# Altium PCB EEG_tDCS_PCB.PcbDoc (part 1 of 2)
Units mm, origin at the board's own origin, x right, y up, seen from the top; angles counter-clockwise.
Board outline 75 x 58.5 mm, 2 copper layers (Top Layer, Bottom Layer); 118 components, 65 nets, 367 pads, 142 vias.
Unrouted connection lines stored in the file: 2.
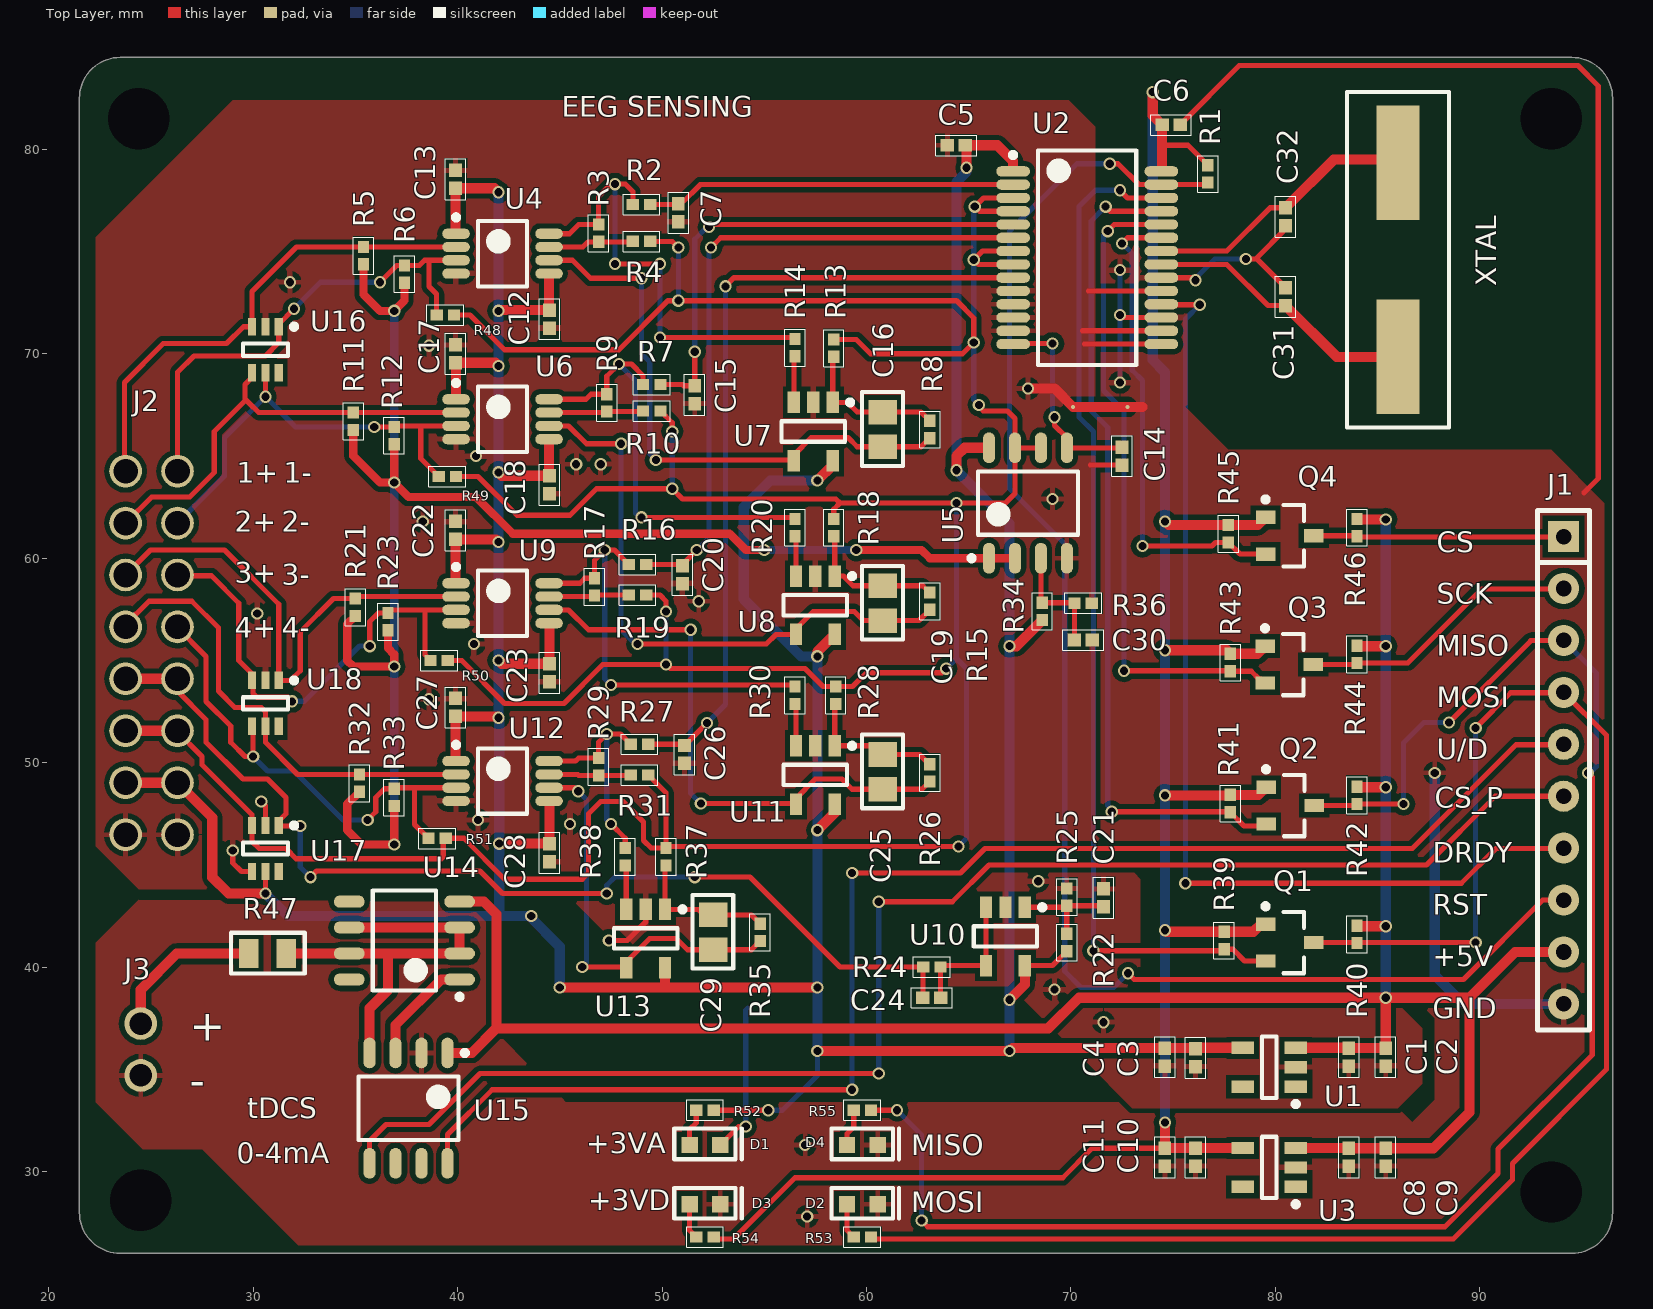
[diagram p0: Top Layer view]
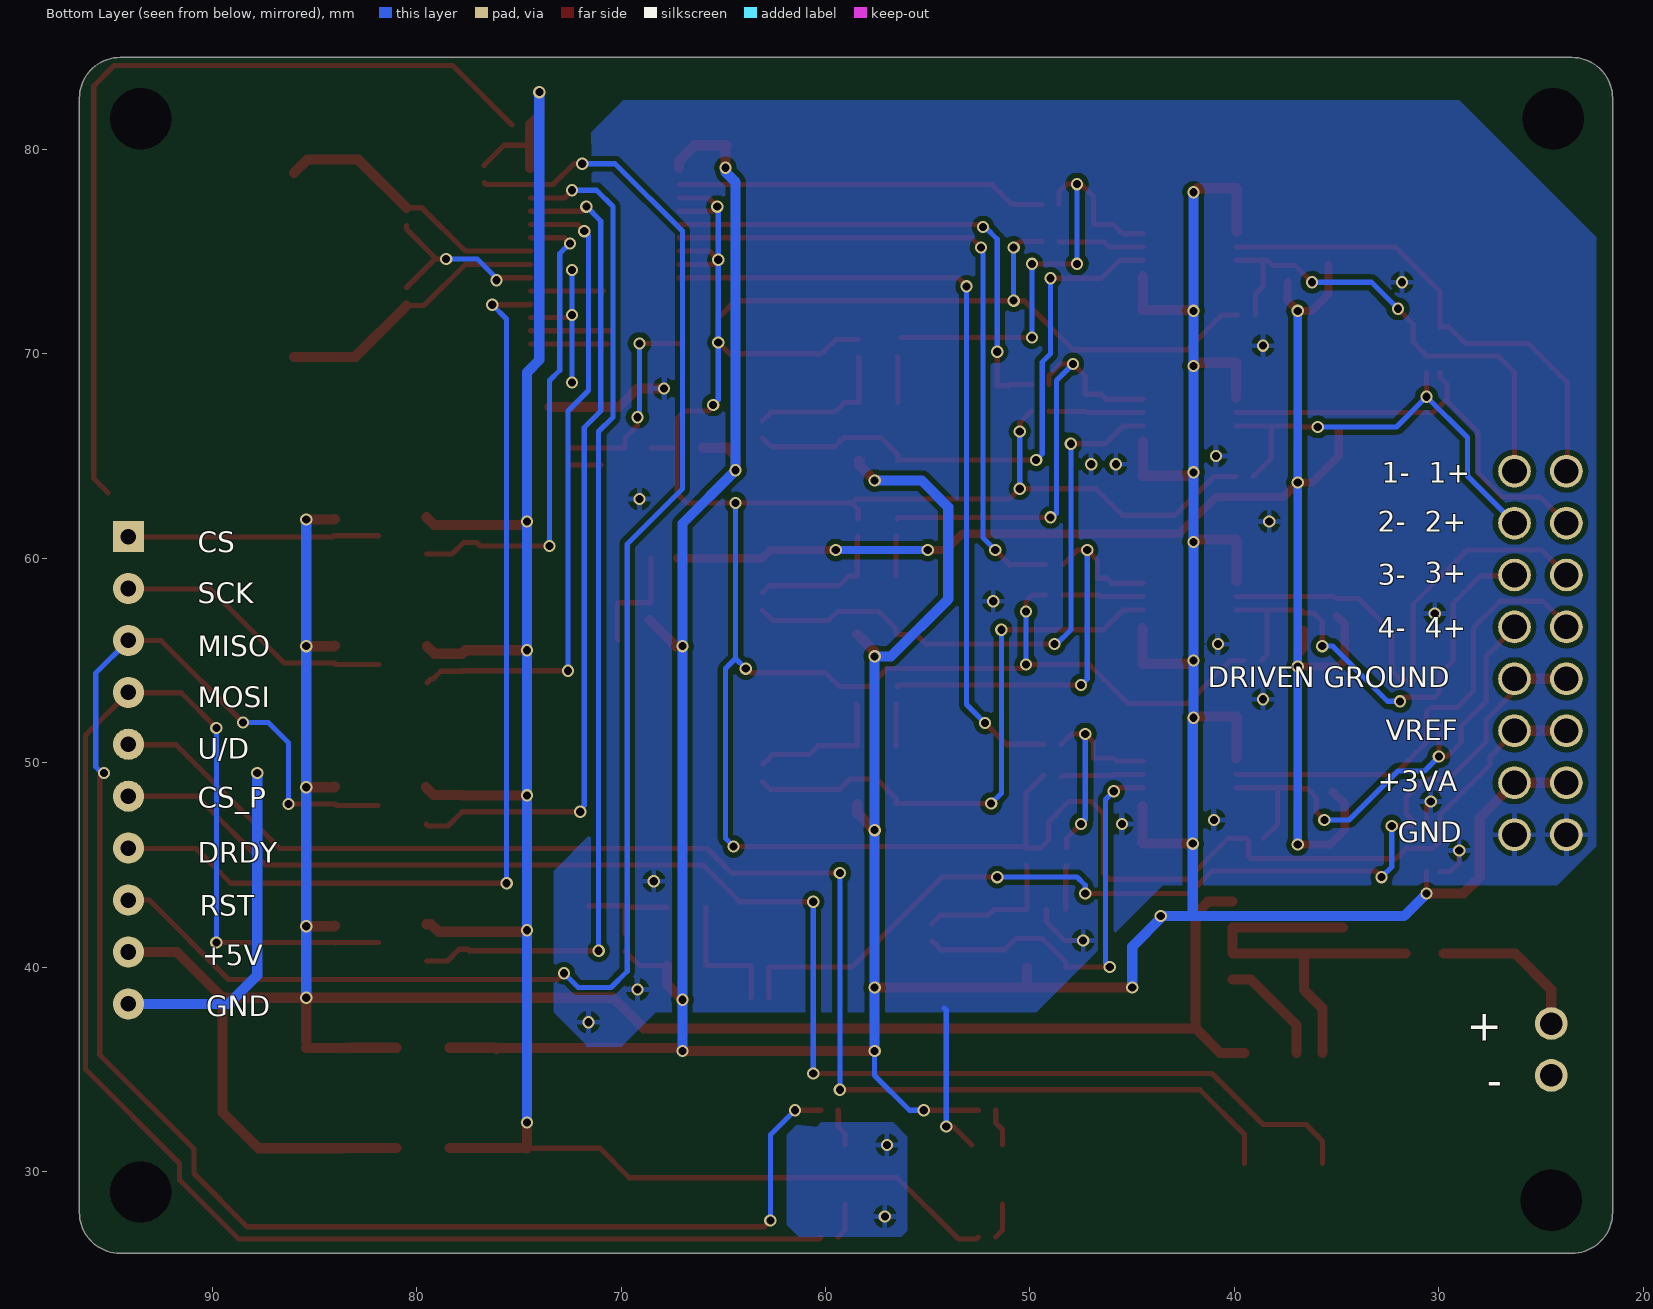
[diagram p1: Bottom Layer view, seen from below]
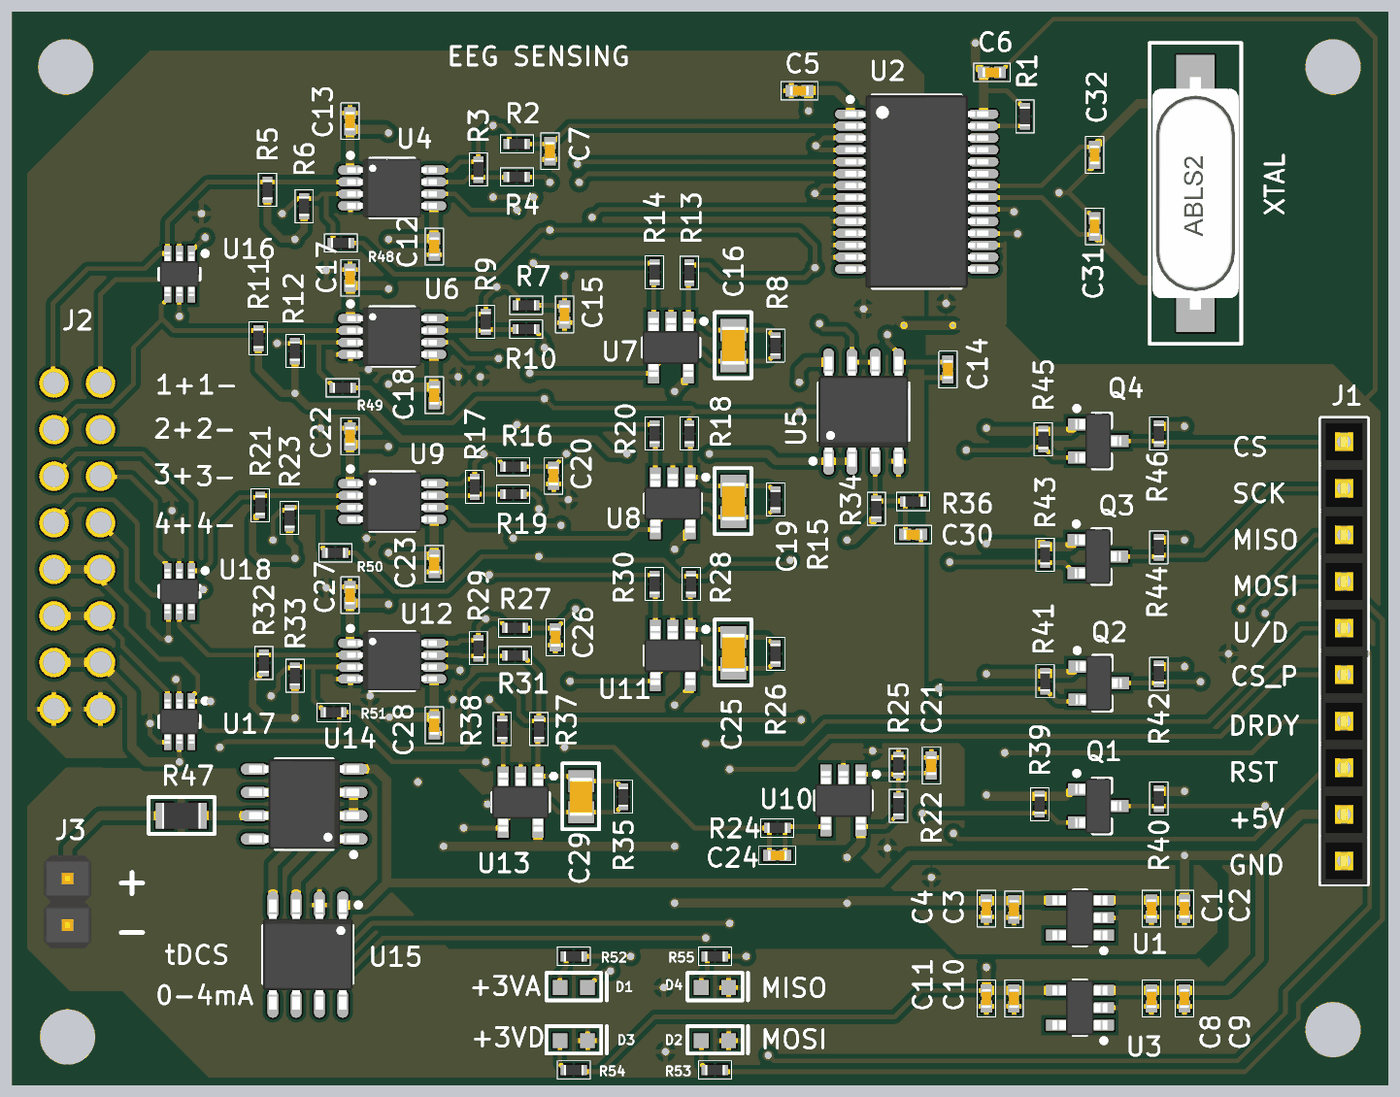
[diagram p2: 3D render of the assembled board from above, using the file's embedded part models]

## Layer stack, top to bottom
Top Solder: solder mask 0.0102, Solder Resist, Dk 3.5
Top Layer: signal copper 0.0356
Dielectric 1: dielectric 0.32, FR-4, Dk 4.8
Bottom Layer: signal copper 0.0356
Bottom Solder: solder mask 0.0102, Solder Resist, Dk 3.5

## Board outline
96.5,28 cw(c94.5,28) 94.5,26 23.5,26 cw(c23.5,28) 21.5,28 21.5,82.5 cw(c23.5,82.5) 23.5,84.5 94.5,84.5 cw(c94.5,82.5) 96.5,82.5

## Design rules (kind name [scope] priority, off if disabled: settings)
Clearance [All] p1: gap=0.254 ignorepadtopadclearanceinfootprint=TRUE except(0: Arc-Hole Track-Hole SMDPad-Hole THPad-Hole Via-Hole Fill-Hole Poly-Hole Region-Hole Text-Hole; 0.2: Arc-Arc Arc-Track Arc-SMDPad Track-Track Track-SMDPad)
PolygonConnect [All] p1: connectstyle=Relief reliefconductorwidth=0.254 reliefentries=4 polygonreliefangle="90 Angle" airgapwidth=0.254
RoutingVias [All] p1: holewidth=0.711 width=1.27 viastyle="Through Hole" minholewidth=0.711 minwidth=1.27 maxholewidth=0.711 maxwidth=1.27
SolderMaskExpansion [All] p1: expansion=0.102
Width [All] p1: maxlimit=2 minlimit=0.254 preferedwidth=0.254 minimp=50.000000 maximp=50.000000 favimp=50.000000
30 further rules are at their usual default settings.

## Components (designator, comment, footprint, x,y, rotation, side; value= is the part's Value field where it differs from the comment)
C1 "100nF" C0402 83.6,35.6 r90 top
C2 "1uF" C0402 85.4,35.6 r90 top
C3 "100nF" C0402 76.1,35.56 r90 top
C4 "1uF" C0402 74.6,35.6 r90 top
C5 "100nF" C0402 64.4,80.2 r0 top
C6 "100nF" C0402 74.9,81.2 r180 top
C7 "1uF" C0402 50.8,76.9 r90 top
C8 "100nF" C0402 83.6,30.7 r90 top
C9 "1uF" C0402 85.4,30.7 r90 top
C10 "100nF" C0402 76.1,30.7 r90 top
C11 "1uF" C0402 74.6,30.7 r90 top
C12 "100nF" C0402 44.5,71.7 r90 top
C13 "100nF" C0402 39.9,78.54 r270 top
C14 "100nF" C0402 72.5,65 r90 top
C15 "1uF" C0402 51.6,68 r90 top
C16 "22uF" C0805 60.8,66.3 r90 top
C17 "100nF" C0402 39.9,70 r270 top
C18 "100nF" C0402 44.5,63.6 r90 top
C19 "22uF" C0805 60.8,57.8 r90 top
C20 "1uF" C0402 51,59.2 r90 top
C21 "1uF" C0402 71.6,43.4 r270 top
C22 "100nF" C0402 39.9,61.36 r270 top
C23 "100nF" C0402 44.5,54.4 r90 top
C24 "1uF" C0402 63.2,38.5 r180 top
C25 "22uF" C0805 60.8,49.55 r90 top
C26 "1uF" C0402 51.1,50.4 r90 top
C27 "100nF" C0402 39.9,52.7 r270 top
C28 "100nF" C0402 44.5,45.6 r90 top
C29 "22uF" C0805 52.5,41.7 r90 top
C30 "1uF" C0402 70.6,56 r180 top
C31 "18pF" C0402 80.5,72.8 r270 top
C32 "18pF" C0402 80.5,76.7 r90 top
D1 "LTST-C191KGKT" LED_0603 52.1,31.3 r0 top
D2 "LTST-C191TBKT-5A" LED_0603 59.8,28.4 r0 top
D3 "LTST-C191KGKT" LED_0603 52.1,28.4 r0 top
D4 "LTST-C191TBKT-5A" LED_0603 59.8,31.3 r0 top
J1 "SAM1198-10-ND" "Header 10x1 8.5mm" 94.1,61.06 r270 top
J2 "302-R161" CONN16POS 26.3,64.26 r270 top
J3 "952-2262-ND" 2PIN_HEADER 24.5,37.24 r270 top
Q1 "BSS138-7-F" SOT23-3 80.7,41.2 r0 top
Q2 "BSS138-7-F" SOT23-3 80.725,47.9 r0 top
Q3 "BSS138-7-F" SOT23-3 80.675,54.8 r0 top
Q4 "BSS138-7-F" SOT23-3 80.7,61.1 r0 top
R1 "100k" R0402 76.7,78.8 r90 top
R2 "1k" R0402 49,77.3 r0 top
R3 "100k" R0402 46.9,75.9 r90 top
R4 "2k" R0402 49,75.5 r180 top
R5 "330k" R0402 35.4,74.8 r90 top
R6 "330k" R0402 37.4,73.9 r90 top
R7 "1k" R0402 49.5,68.5 r0 top
R8 "1M" R0402 63.1,66.3 r90 top
R9 "100k" R0402 47.3,67.6 r90 top
R10 "2k" R0402 49.5,67.2 r180 top
R11 "330k" R0402 34.9,66.7 r90 top
R12 "330k" R0402 36.9,66 r90 top
R13 "499k" R0402 58.4,70.275 r90 top
R14 "1M" R0402 56.5,70.3 r90 top
R15 "1M" R0402 63.1,57.9 r90 top
R16 "1k" R0402 48.8,59.7 r0 top
R17 "100k" R0402 46.7,58.6 r90 top
R18 "499k" R0402 58.4,61.5 r90 top
R19 "2k" R0402 48.8,58.2 r180 top
R20 "1M" R0402 56.5,61.5 r90 top
R21 "330k" R0402 35,57.6 r90 top
R22 "100k" R0402 69.8,41.2 r270 top
R23 "330k" R0402 36.6,56.9 r90 top
R24 "330k" R0402 63.2,40 r0 top
R25 "100k" R0402 69.8,43.425 r270 top
R26 "1M" R0402 63.1,49.5 r90 top
R27 "1k" R0402 48.9,50.9 r0 top
R28 "499k" R0402 58.5,53.3 r90 top
R29 "100k" R0402 46.9,49.8 r90 top
R30 "1M" R0402 56.5,53.3 r90 top
R31 "2k" R0402 48.9,49.4 r180 top
R32 "330k" R0402 35.2,49 r90 top
R33 "330k" R0402 36.9,48.3 r90 top
R34 "100k" R0402 68.6,57.4 r270 top
R35 "1M" R0402 54.8,41.7 r90 top
R36 "100k" R0402 70.6,57.8 r180 top
R37 "499k" R0402 50.2,45.4 r90 top
R38 "1M" R0402 48.2,45.4 r90 top
R39 "10k" R0402 77.5,41.3 r90 top
R40 "10k" R0402 84,41.6 r90 top
R41 "10k" R0402 77.8,48 r90 top
R42 "10k" R0402 84,48.4 r90 top
R43 "10k" R0402 77.8,54.9 r90 top
R44 "10k" R0402 84,55.3 r90 top
R45 "10k" R0402 77.7,61.2 r90 top
R46 "10k" R0402 84,61.5 r90 top
R47 "100R" R0805 30.7,40.665 r0 top
R48 "0R" R0402 39.4,71.9 r0 top
R49 "0R" R0402 39.5,64 r0 top
R50 "0R" R0402 39.1,55 r0 top
R51 "0R" R0402 39,46.3 r0 top
R52 "300R" R0402 52.1,33 r180 top
R53 "300R" R0402 59.8,26.8 r180 top
R54 "300R" R0402 52.1,26.8 r180 top
R55 "300R" R0402 59.8,33 r180 top
U1 "NCP551SN30T1G" TSOP-5 79.7,35.1 r180 top
U2 "MCP3912A1-E/SS" SSOP-28 70.8,74.7 r0 top
U3 "NCP551SN30T1G" TSOP-5 79.7,30.2 r180 top
U4 "AD8237ARMZ-R7" MSOP-8 42.2,74.9 r0 top
U5 "LM7332MAX/NOPB" 8-SOIC 67.9,62.7 r90 top
U6 "AD8237ARMZ-R7" MSOP-8 42.2,66.8 r0 top
U7 "MCP6V31T-E/OT" SOT23-5 57.4,66.2 r270 top
U8 "MCP6V31T-E/OT" SOT23-5 57.5,57.7 r270 top
U9 "AD8237ARMZ-R7" MSOP-8 42.2,57.8 r0 top
U10 "MCP6V31T-E/OT" SOT23-5 66.8,41.5 r270 top
U11 "MCP6V31T-E/OT" SOT23-5 57.5,49.4 r270 top
U12 "AD8237ARMZ-R7" MSOP-8 42.2,49.1 r0 top
U13 "MCP6V31T-E/OT" SOT23-5 49.2,41.4 r270 top
U14 "LM334MX/NOPB" 8-SOIC 37.4,41.3 r180 top
U15 "MCP4011-103E/SN" 8-SOIC 37.6,33.1 r270 top
U16 "TPD4E1U06DBVR" SOT23-6 30.6,70.2 r270 top
U17 "TPD4E1U06DBVR" SOT23-6 30.6,45.8 r270 top
U18 "TPD4E1U06DBVR" SOT23-6 30.6,52.9 r270 top
XTAL "ABLS-4.000MHZ-B2-T" XTAL 86,74.6 r90 top
? "NETTIE" NETTIE 71.5,67.4 r0 top net-tie

## Footprints (in the part's own frame and the unit in brackets; to place one, negate y for a bottom-side part, rotate by r counter-clockwise, add the part's x,y. Pads: shape width x height; smd on the part's side, far side on the other; paste and mask are expansions set on the pad)
2PIN_HEADER [mm]
  round 1.6 hole 1.1: 1(0,0) 2(2.54,0)
  body extent -1.27,-1.27 3.81,1.27, height 9.5
8-SOIC [mm] "SOIC, 8-Leads, Body 4.90x3.90mm, Pitch 1.27mm, IPC Medium Density"
  oval 1.5x0.6 smd: 1(-2.7,1.905) 2(-2.7,0.635) 3(-2.7,-0.635) 4(-2.7,-1.905) 5(2.7,-1.905) 6(2.7,-0.635) 7(2.7,0.635) 8(2.7,1.905)
  silkscreen extent -2.82,-2.45 1.55,2.88, body extent -3,-2.45 3,2.45, height 1.75
C0402 [mm] "Chip Capacitor, 2-Leads, Body 1.00x0.50mm, IPC Medium Density"
  rect 0.66x0.62 smd: 1(-0.44,0) 2(0.44,0)
  silkscreen extent -1,-0.5 1,0.5, body extent -0.53,-0.28 0.53,0.28, height 0.55
C0805 [mm] "Chip Capacitor, 2-Leads, Body 2.00x1.25mm, IPC Medium Density"
  rect 1.2x1.4 smd: 1(-0.85,0) 2(0.85,0)
  silkscreen extent -1.78,-0.98 1.82,1.02, body extent -1.05,-0.63 1.05,0.63, height 1.35
CONN16POS [mm]
  round 1.6 hole 1.2: 1(0,0) 2(2.54,0) 3(5.08,0) 4(7.62,0) 5(10.16,0) 6(12.7,0) 7(15.24,0) 8(17.78,0) 9(0,-2.54) 10(2.54,-2.54) 11(5.08,-2.54) 12(7.62,-2.54) 13(10.16,-2.54) 14(12.7,-2.54) 15(15.24,-2.54) 16(17.78,-2.54)
"Header 10x1 8.5mm" [mil] "Stackable 10 pin header"
  rect 60x60 hole 30: 1(0,0)
  round 60 hole 30: 2(100,0) 3(200,0) 4(300,0) 5(400,0) 6(500,0) 7(600,0) 8(700,0) 9(800,0) 10(900,0)
  silkscreen extent -50,-50 950,50, body extent -50,-50 950,50, height 335
LED_0603 [mm]
  rect 0.8x0.8 smd: 1(-0.75,0) 2(0.75,0)
  silkscreen extent -1.5,-0.7 1.8,0.8
MSOP-8 [mm] "TSOP, 8-Leads, Body 3.00x3.00mm, Pitch 0.65mm, IPC Medium Density"
  oval 1.35x0.5 smd: 1(-2.275,0.975) 2(-2.275,0.325) 3(-2.275,-0.325) 4(-2.275,-0.975) 5(2.275,-0.975) 6(2.275,-0.325) 7(2.275,0.325) 8(2.275,0.975)
  silkscreen extent -2.4,-1.6 1.2,1.9, body extent -2.45,-1.6 2.45,1.6, height 1.1
NETTIE [mm]
  round 0.2 smd: 1(-1.397,0) 2(1.27,0)
  Top Layer lines w0.5: -1.397,0 1.27,0
R0402 [mm] "Chip Resistor, 2-Leads, Body 1.00x0.50mm, IPC Medium Density"
  rect 0.6x0.55 smd: 1(-0.425,0) 2(0.425,0)
  silkscreen extent -0.9,-0.5 0.9,0.5, body extent -0.53,-0.28 0.53,0.28, height 0.4
R0805 [mm] "Chip Resistor, 2-Leads, Body 2.00x1.25mm, IPC Medium Density"
  rect 0.95x1.4 smd: 1(-0.925,0) 2(0.925,0)
  silkscreen extent -1.78,-0.98 1.82,1.02, body extent -1.05,-0.7 1.05,0.7, height 0.6
SOT23-3 [mm] "SOT23, 3-Leads, Body 2.90x2.35mm, Pitch 0.90mm, IPC Medium Density"
  rect 0.95x0.65 smd: 1(-1.175,0.9) 2(-1.175,-0.9) 3(1.175,0)
  silkscreen extent -1.3,-1.5 0.7,1.9, body extent -1.25,-1.5 1.25,1.5, height 1.1
SOT23-5 [mm] "SOT23, 5-Leads, Body 2.90x2.70mm, Pitch 0.95mm, IPC Medium Density"
  rect 1.05x0.6 smd: 1(-1.425,0.95) 2(-1.425,0) 3(-1.425,-0.95) 4(1.425,-0.95) 5(1.425,0.95)
  silkscreen extent -1.55,-1.55 0.5,1.93, body extent -1.6,-1.55 1.6,1.55, height 1.45
SOT23-6 [mm] "SOT23, 6-Leads, Body 2.00x2.10mm, Pitch 0.65mm, IPC Medium Density"
  rect 0.85x0.4 smd: 1(-1.125,0.65) 2(-1.125,0) 3(-1.125,-0.65) 4(1.125,-0.65) 5(1.125,0) 6(1.125,0.65)
  silkscreen extent -1.25,-1.1 0.3,1.53, body extent -1.2,-1.07 1.2,1.07, height 1.1
SSOP-28 [mm] "SOP, 28-Leads, Body 10.20x5.30mm, Pitch 0.65mm, IPC Medium Density"
  oval 1.65x0.5 smd: 1(-3.625,4.225) 2(-3.625,3.575) 3(-3.625,2.925) 4(-3.625,2.275) 5(-3.625,1.625) 6(-3.625,0.975) 7(-3.625,0.325) 8(-3.625,-0.325) 9(-3.625,-0.975) 10(-3.625,-1.625) 11(-3.625,-2.275) 12(-3.625,-2.925) 13(-3.625,-3.575) 14(-3.625,-4.225) 15(3.625,-4.225) 16(3.625,-3.575) 17(3.625,-2.925) 18(3.625,-2.275) 19(3.625,-1.625) 20(3.625,-0.975) 21(3.625,-0.325) 22(3.625,0.325) 23(3.625,0.975) 24(3.625,1.625) 25(3.625,2.275) 26(3.625,2.925) 27(3.625,3.575) 28(3.625,4.225)
  silkscreen extent -3.75,-5.25 2.4,5.25, body extent -3.9,-5.25 3.9,5.25, height 2
TSOP-5 [mm] "SOT23, 5-Leads, Body 3.00x2.75mm, Pitch 0.95mm, IPC Medium Density"
  rect 1.1x0.6 smd: 1(-1.3,0.95) 2(-1.3,0) 3(-1.3,-0.95) 4(1.3,-0.95) 5(1.3,0.95)
  silkscreen extent -1.43,-1.5 0.35,1.92, body extent -1.5,-1.5 1.5,1.5, height 1.1
XTAL [mm]
  rect 5.6x2.1 smd: 1(-4.75,0) 2(4.75,0)
  silkscreen extent -8.2,-2.5 8.2,2.5, body extent -6.35,-2.35 6.35,2.35, height 3.16

## Part data
C1 C3 C5 C6 C8 C10 C12 C13 C14 C17 C18 C22 C23 C27 C28: library part CL05A104MP5NNNC, "CAP CER 0.1uF 10V X5R 20% SMD 0402 85C Paper T/R", Case/Package=0402, Case Code (Metric)=1005, Dielectric=X5R, Manufacturer=Samsung, Max Operating Temperature=85°C, Min Operating Temperature=-55°C, Supplier Part Number 1=1276-1443-1-ND, Tolerance=20%, Voltage Rating=10V, Capacitance=100nF, Case Code (Imperial)=0402, ComponentLink1Description=https://media.digikey.com/pdf/Data%20Sheets/Samsung%20PDFs/CL_Series_MLCC_ds.pdf, ComponentLink1URL=https://media.digikey.com/pdf/Data%20Sheets/Samsung%20PDFs/CL_Series_MLCC_ds.pdf, Depth=0.5mm, Height=0.5mm, Lead Free="Lead Free", Length=1mm, Manufacturer Part Number=CL05A104MP5NNNC, Mount="Surface Mount", Packaging="Tape and Reel", Pricing 1="1=0.1, 10=0.024, 100=0.0106, 500=0.0076, 1000=0.006, 2500=0.0054, 5000=0.005 (USD)", Radiation Hardening=No, Stock 1=100000, Supplier 1=Digi-Key, Thickness=0.022inch, Voltage Rating (DC)=10V, Width=0.02inch
C2 C4 C7 C9 C11 C15 C20 C21 C24 C26 C30: library part CL05A105MP5NNNC, "CAP CER 1uF 10V X5R 20% SMD 0402 85C Paper T/R", Case/Package=0402, Case Code (Metric)=1005, Dielectric=X5R, Manufacturer=Samsung, Max Operating Temperature=85°C, Min Operating Temperature=-55°C, Package Quantity=1, Supplier Part Number 1=1276-1448-1-ND, Tolerance=20%, Voltage Rating=10V, Capacitance=1uF, Case Code (Imperial)=0402, ComponentLink1Description=https://media.digikey.com/pdf/Data%20Sheets/Samsung%20PDFs/CL_Series_MLCC_ds.pdf, ComponentLink1URL=https://media.digikey.com/pdf/Data%20Sheets/Samsung%20PDFs/CL_Series_MLCC_ds.pdf, Depth=0.5mm, Height=0.5mm, Lead Free="Lead Free", Length=1mm, Manufacturer Part Number=CL05A105MP5NNNC, Mount="Surface Mount", Packaging="Tape and Reel", Pricing 1="1=0.1, 10=0.031, 100=0.014, 500=0.01, 1000=0.0079, 2500=0.0072, 5000=0.0066 (USD)", Radiation Hardening=No, Stock 1=51298, Supplier 1=Digi-Key, Thickness=0.022inch, Voltage Rating (DC)=10V, Width=0.02inch
C16 C19 C25 C29: library part CL21A226KPCLRNC, "CAP CER 22uF 10V X5R 10% SMD 0805 85C Cardboard T/R", Case/Package=0805, Case Code (Metric)=2012, Dielectric=X5R, Manufacturer=Samsung, Max Operating Temperature=85°C, Min Operating Temperature=-55°C, Supplier Part Number 1=1276-6786-1-ND, Tolerance=10%, Voltage Rating=10V, Capacitance=22uF, Case Code (Imperial)=0805, ComponentLink1Description=https://www.verical.com/server-webapp/html/getDatasheet?partID=781772, ComponentLink1URL=https://www.verical.com/server-webapp/html/getDatasheet?partID=781772, Depth=1.25mm, Lead Free="Lead Free", Length=2mm, Manufacturer Part Number=CL21A226KPCLRNC, Mount="Surface Mount", Packaging="Tape and Reel", Pricing 1="1=0.38, 10=0.26, 100=0.1471, 500=0.1039, 1000=0.0909 (USD)", Radiation Hardening=No, Stock 1=40000, Supplier 1=Digi-Key, Thickness=0.037inch, Width=0.049inch
C31 C32: library part CL05C180JB5NNNC, "CAP CER 18pF 50V C0G 5% SMD 0402 125C Paper T/R", Case/Package=0402, Case Code (Metric)=1005, Dielectric=C0G, Manufacturer=Samsung, Max Operating Temperature=125°C, Min Operating Temperature=-55°C, Package Quantity=1, Supplier Part Number 1=1276-1140-1-ND, Temperature Coefficient=300ppm/°C, Tolerance=5%, Voltage=50V, Capacitance=18pF, Case Code (Imperial)=0402, ComponentLink1Description=https://www.verical.com/server-webapp/html/getDatasheet?partID=482699, ComponentLink1URL=https://www.verical.com/server-webapp/html/getDatasheet?partID=482699, ComponentLink2Description=https://www.distrelec.biz/Web/Downloads/_e/ng/MLCC_CatalogDownload2013_ENG.pdf?mime=application%2Fpdf, ComponentLink2URL=https://www.distrelec.biz/Web/Downloads/_e/ng/MLCC_CatalogDownload2013_ENG.pdf?mime=application%2Fpdf, ComponentLink3Description=https://produktinfo.conrad.com/datenblaetter/450000-474999/458675-da-01-en-VS_KONDENSATOR_0402.pdf, ComponentLink3URL=https://produktinfo.conrad.com/datenblaetter/450000-474999/458675-da-01-en-VS_KONDENSATOR_0402.pdf, Contact Plating=Tin, Depth=0.5mm, Height=0.5mm, Length=1mm, Manufacturer Part Number=CL05C180JB5NNNC, Material=Ceramic, Mount="Surface Mount", Packaging="Tape and Reel", Pricing 1="1=0.1, 10=0.033, 100=0.0148, 500=0.0105, 1000=0.0083, 2500=0.0075, 5000=0.0069 (USD)", Radiation Hardening=No, Stock 1=42154, Supplier 1=Digi-Key, Thickness=0.022inch, Voltage Rating=50V, Width=0.02inch
D1 D3: "LED GREEN CLEAR 0603 SMD", Case/Package=0603, Case Code (Metric)=1608, Colour=Green, Forward Current=30mA, Forward Voltage=2V, Lens Colour=Clear,Colorless, Manufacturer="Vishay Lite-On", Max Operating Temperature=85°C, Min Operating Temperature=-55°C, Package Quantity=1, Power Dissipation=75mW, Supplier Part Number 1=160-1446-6-ND, Test Current=20mA, Case Code (Imperial)=0603, ComponentLink1Description=https://datasheet.ciiva.com/12400/100-ltst-c191kgkt-53586-12400818.pdf, ComponentLink1URL=https://datasheet.ciiva.com/12400/100-ltst-c191kgkt-53586-12400818.pdf, ComponentLink2Description=https://datasheet.ciiva.com/2109/s-110-ltst-c191kgkt-2109973.pdf, ComponentLink2URL=https://datasheet.ciiva.com/2109/s-110-ltst-c191kgkt-2109973.pdf, ComponentLink3Description=https://datasheet.ciiva.com/2109/s-110-ltst-c191kgkt-2109974.pdf, ComponentLink3URL=https://datasheet.ciiva.com/2109/s-110-ltst-c191kgkt-2109974.pdf, ComponentLink4Description=https://datasheet.ciiva.com/2109/s-110-ltst-c191kgkt-2109975.pdf, ComponentLink4URL=https://datasheet.ciiva.com/2109/s-110-ltst-c191kgkt-2109975.pdf, ComponentLink5Description=https://datasheet.ciiva.com/15223/getdatasheetpartid-103913-15223276.pdf, ComponentLink5URL=https://datasheet.ciiva.com/15223/getdatasheetpartid-103913-15223276.pdf, ComponentLink6Description=https://datasheet.ciiva.com/11773/0900766b80dc02b1-11773629.pdf, ComponentLink6URL=https://datasheet.ciiva.com/11773/0900766b80dc02b1-11773629.pdf, ComponentLink7Description=https://datasheet.ciiva.com/16215/ltst-c191kgkt-16215151.pdf, ComponentLink7URL=https://datasheet.ciiva.com/16215/ltst-c191kgkt-16215151.pdf, Depth=0.8mm, Dominant Wavelength=571nm, Height=0.55mm, Illumination Colour=Green, Lead Free="Lead Free", Length=1.6mm, Lens Style=Clear,Diffused,Colorless,Rectangular, Lens Transparency=Clear, Luminous Intensity=35mcd, Manufacturer Part Number=LTST-C191KGKT, Mount="Surface Mount", Number of Elements=1, Number of LEDs=1, Number of Pins=2, Packaging="Tape and Reel", Power Rating=75mW, Pricing 1="1=0.29, 10=0.211, 25=0.1556, 100=0.1111, 250=0.0756, 500=0.0667, 1000=0.0522, 2500=0.0511 (USD)", Radiation Hardening=No, Stock 1=1301664, Supplier 1=Digi-Key, Viewing Angle=130°, Wavelength=574nm, Width=0.8mm
D2 D4: "LED BLUE CLEAR 0603 SMD", Case/Package=0603, Case Code (Metric)=1608, Colour=Blue, Forward Current=20mA, Forward Voltage=2.8V, Lens Colour=Colorless, Manufacturer="Vishay Lite-On", Max Operating Temperature=80°C, Min Operating Temperature=-20°C, Package Quantity=5000, Supplier Part Number 1=160-2212-6-ND, Test Current=5mA, Voltage=29V, Case Code (Imperial)=0603, ComponentLink1Description=http://components.arrow.com/part/dataview/52218576S9813001N1331, ComponentLink1URL=http://components.arrow.com/part/dataview/52218576S9813001N1331, ComponentLink2Description=http://optoelectronics.liteon.com/zh-cn/api/DwonloadFileHandler.ashx?txtSpecNo=DS22-2003-020&txtPartNo=LTST-C191TBKT-5A, ComponentLink2URL=http://optoelectronics.liteon.com/zh-cn/api/DwonloadFileHandler.ashx?txtSpecNo=DS22-2003-020&txtPartNo=LTST-C191TBKT-5A, Dominant Wavelength=473nm, Height=0.55mm, Illumination Colour=Blue, Length=1.6mm, Lens Style=Diffused,Colorless,Rectangular, Lens Transparency=Clear, Luminous Intensity=15mcd, Manufacturer Part Number=LTST-C191TBKT-5A, Mount="Surface Mount", Number of LEDs=1, Packaging="Tape and Reel", Pricing 1="1=0.52, 10=0.376, 25=0.2884, 100=0.1881, 250=0.138, 500=0.117, 1000=0.0961, 2500=0.0836 (USD)", Radiation Hardening=No, Stock 1=2918, Supplier 1=Digi-Key, Viewing Angle=130°, Width=0.8mm
J1: library part CONN_10pin, "10 pin header connector", Supplier Part Number 1=2698789, Supplier 1=Arrow, Supplier 2=Arrow, Supplier 3=Digi-Key, Supplier Part Number 2=2698803S4475693N1004, Supplier Part Number 3=SAM1198-10-ND
J2: "16 Positions Header, Shrouded Connector 0.100\" (2.54mm) Through Hole, Right Angle Gold", Colour=Black, Manufacturer="On-Shore Technology", Supplier Part Number 1=ED10535-ND, ComponentLink1Description=http://www.on-shore.com/wp-content/uploads/2015/09/302-rxxx.pdf, ComponentLink1URL=http://www.on-shore.com/wp-content/uploads/2015/09/302-rxxx.pdf, Connector Type="Male Pin", Contact Plating=Gold, Manufacturer Part Number=302-R161, Mount="Through Hole", Number of Positions=16, Number of Rows=2, Packaging=Tray, Pitch=0.1inch, Pricing 1="1=0.44, 10=0.417, 180=0.3197, 540=0.278, 1080=0.2294, 5040=0.2016, 10080=0.1877 (USD)", Row Spacing=0.1inch, Stock 1=7509, Supplier 1=Digi-Key, Termination=Solder
J3: library part M20-9990246, "CONN_HeaderPins2pos Headers & Wire Housings 02 SIL VERTICAL PIN HEADER TIN", Case/Package=SIL, Colour=Black, Contact Resistance=30mR, Current Rating=3A, Insulation Resistance=10GR, Manufacturer=Harwin, Max Operating Temperature=105°C, Min Operating Temperature=-40°C, Package Quantity=1000, Voltage Rating (AC)=750V, ComponentLink1Description=https://datasheet.ciiva.com/8046/315376-8046930.pdf, ComponentLink1URL=https://datasheet.ciiva.com/8046/315376-8046930.pdf, ComponentLink2Description=https://datasheet.ciiva.com/6833/m20-999-6833368.pdf, ComponentLink2URL=https://datasheet.ciiva.com/6833/m20-999-6833368.pdf, ComponentLink3Description=https://datasheet.ciiva.com/11745/0900766b81034e61-11745755.pdf, ComponentLink3URL=https://datasheet.ciiva.com/11745/0900766b81034e61-11745755.pdf, ComponentLink4Description=https://datasheet.ciiva.com/22660/1830818-22660571.pdf, ComponentLink4URL=https://datasheet.ciiva.com/22660/1830818-22660571.pdf, ComponentLink5Description=https://datasheet.ciiva.com/26852/getdatasheetpartid-384170-26852203.pdf, ComponentLink5URL=https://datasheet.ciiva.com/26852/getdatasheetpartid-384170-26852203.pdf, Connector Type="Male Pin", Contact Material=Bronze,Brass, Contact Mating Length=0.24inch, Contact Plating=Tin, Depth=2.54mm, Gender=Male, Housing Colour=Black, Housing Material=Nylon, Length=5.08mm, Manufacturer Part Number=M20-9990246, Max Current Rating=3A, Number of Contacts=2, Number of Positions=2, Number of Rows=1, Orientation=Straight, Packaging=Bulk, Pitch=2.54mm, Pricing 1="1=0.11, 10=0.099, 100=0.0609, 500=0.0504, 1000=0.0441, 5000=0.0378, 10000=0.0368 (USD)", Radiation Hardening=No, REACH SVHC="No SVHC", Stock 1=53577, Supplier 1=Digi-Key, Supplier Part Number 1=952-2262-ND, Termination=Solder
Q1 Q2 Q3 Q4: "MOSFET N-CH 50V 200MA SOT23-3", Case/Package=SOT-23, Continuous Drain Current (ID)=200mA, Current=2A, Drain to Source Breakdown Voltage=50V, Drain to Source Resistance=3.5R, Gate to Source Voltage (Vgs)=20V, Input Capacitance=50pF, Manufacturer=Diodes, Max Operating Temperature=150°C, Max Power Dissipation=300mW, Min Operating Temperature=-55°C, Package Quantity=3000, Supplier Part Number 1=BSS138-FDICT-ND, Threshold Voltage=1.2V, ComponentLink1Description=http://www.diodes.com/datasheets/BSS138.pdf, ComponentLink1URL=http://www.diodes.com/datasheets/BSS138.pdf, ComponentLink2Description=http://www.farnell.com/datasheets/1915619.pdf, ComponentLink2URL=http://www.farnell.com/datasheets/1915619.pdf, ComponentLink3Description=https://www.diodes.com/assets/Datasheets/ds30144.pdf, ComponentLink3URL=https://www.diodes.com/assets/Datasheets/ds30144.pdf, ComponentLink4Description=http://www.diodes.com/_files/datasheets/ds30144.pdf, ComponentLink4URL=http://www.diodes.com/_files/datasheets/ds30144.pdf, Contact Plating=Matte,Tin, Current Rating=200mA, Drain to Source Voltage (Vdss)=50V, Element Configuration=Single, Fall Time=25ns, Height=1mm, Lead Free="Lead Free", Length=2.9mm, Manufacturer Part Number=BSS138-7-F, Mount="Surface Mount", Nominal Vgs=1.2V, Number of Channels=1, Number of Elements=1, Number of Pins=3, On-State Resistance=3.5R, Packaging="Tape and Reel", Power Dissipation=300mW, Pricing 1="1=0.23, 10=0.212, 100=0.119, 500=0.0637, 1000=0.0433 (USD)", Rds On Max=3.5R, REACH SVHC="No SVHC", Rise Time=10ns, Stock 1=6200, Supplier 1=Digi-Key, Turn-Off Delay Time=20ns, Turn-On Delay Time=20ns, Voltage=50V, Voltage Rating (DC)=50V, Weight=0.000282oz, Width=1.3mm
R1 R3 R9 R17 R22 R25 R29 R34 R36: library part RC0402FR-07100KL, "RES SMD 100K OHM 1% 1/16W 0402", Case/Package=0402, Case Code (Metric)=1005, Manufacturer=Yageo, Max Operating Temperature=155°C, Max Power Dissipation=63mW, Min Operating Temperature=-55°C, Package Quantity=1, Resistance=100kR, Supplier Part Number 1=311-100KLRCT-ND, Temperature Coefficient=100ppm/°C, Tolerance=1%, Voltage Rating=50V, Case Code (Imperial)=0402, ComponentLink1Description=http://www.yageo.com/documents/recent/PYu-RC_Group_51_RoHS_L_9.pdf, ComponentLink1URL=http://www.yageo.com/documents/recent/PYu-RC_Group_51_RoHS_L_9.pdf, ComponentLink2Description=http://www.farnell.com/datasheets/1018594.pdf, ComponentLink2URL=http://www.farnell.com/datasheets/1018594.pdf, ComponentLink3Description=http://www.yageo.com/documents/recent/PYu-RC_Group_51_RoHS_L_8.pdf, ComponentLink3URL=http://www.yageo.com/documents/recent/PYu-RC_Group_51_RoHS_L_8.pdf, ComponentLink4Description=http://documents.rs-components.com/techlib://itc_doclist_GB.htm?stockno=6185797, ComponentLink4URL=http://documents.rs-components.com/techlib://itc_doclist_GB.htm?stockno=6185797, Composition="Thick Film", Depth=0.5mm, Features="Moisture Resistant", Height=0.016inch, Lead Free="Lead Free", Length=0.039inch, Manufacturer Part Number=RC0402FR-07100KL, Military Standard=Not, Number of Terminations=2, Packaging="Tape and Reel", Power Rating=63mW, Pricing 1="1=0.1, 10=0.018, 100=0.0073, 1000=0.0033, 2500=0.0029, 5000=0.0024 (USD)", REACH SVHC="No SVHC", Stock 1=16311362, Supplier 1=Digi-Key, Termination=SMD/SMT, Width=0.02inch, Working Voltage=50V
R2 R7 R16 R27: library part RC0402FR-071KL, "RES SMD 1K OHM 1% 1/16W 0402", Case/Package=0402, Case Code (Metric)=1005, Manufacturer=Yageo, Max Operating Temperature=155°C, Min Operating Temperature=-55°C, Power Rating=62.5mW, Resistance=1kR, Supplier Part Number 1=311-1.00KLRCT-ND, Temperature Coefficient=100ppm/°C, Tolerance=1%, Voltage Rating=50V, Case Code (Imperial)=0402, ComponentLink1Description=http://documents.rs-components.com/techlib://itc_doclist_GB.htm?stockno=6186122, ComponentLink1URL=http://documents.rs-components.com/techlib://itc_doclist_GB.htm?stockno=6186122, ComponentLink2Description=http://www.mouser.com/ds/2/447/PYu-RC0402_51_RoHS_L_6_r-8721.pdf, ComponentLink2URL=http://www.mouser.com/ds/2/447/PYu-RC0402_51_RoHS_L_6_r-8721.pdf, ComponentLink3Description=http://www.yageo.com/documents/recent/PYu-RC0402_51_RoHS_L_6_r.pdf, ComponentLink3URL=http://www.yageo.com/documents/recent/PYu-RC0402_51_RoHS_L_6_r.pdf, ComponentLink4Description=http://www.farnell.com/datasheets/1018594.pdf, ComponentLink4URL=http://www.farnell.com/datasheets/1018594.pdf, Composition="Thick Film", Depth=0.5mm, Height=0.32mm, Lead Free="Lead Free", Length=1mm, Manufacturer Part Number=RC0402FR-071KL, Military Standard=Not, Number of Pins=2, Packaging="Tape and Reel", Pricing 1="1=0.1, 10=0.018, 100=0.0073, 1000=0.0033, 2500=0.0029, 5000=0.0024 (USD)", REACH SVHC=Unknown, Stock 1=121806164, Supplier 1=Digi-Key, Termination=SMD/SMT, Voltage Rating (DC)=50V, Width=0.5mm
R4 R10 R19 R31: library part RC0402FR-072KL, "RES SMD 2K OHM 1% 1/16W 0402", Case/Package=0402, Case Code (Metric)=1005, Manufacturer=Yageo, Max Operating Temperature=155°C, Max Power Dissipation=63mW, Min Operating Temperature=-55°C, Package Quantity=1, Resistance=2kR, Supplier Part Number 1=311-2KLRCT-ND, Temperature Coefficient=100ppm/°C, Tolerance=1%, Voltage Rating=50V, Case Code (Imperial)=0402, ComponentLink1Description=http://www.yageo.com/documents/recent/PYu-RC_Group_51_RoHS_L_9.pdf, ComponentLink1URL=http://www.yageo.com/documents/recent/PYu-RC_Group_51_RoHS_L_9.pdf, ComponentLink2Description=http://documents.rs-components.com/techlib://itc_doclist_GB.htm?stockno=6186510, ComponentLink2URL=http://documents.rs-components.com/techlib://itc_doclist_GB.htm?stockno=6186510, ComponentLink3Description=https://www.verical.com/server-webapp/html/getDatasheet?partID=358921, ComponentLink3URL=https://www.verical.com/server-webapp/html/getDatasheet?partID=358921, ComponentLink4Description=http://www.mouser.com/ds/2/447/PYu-RC0402_51_RoHS_L_6_r-8721.pdf, ComponentLink4URL=http://www.mouser.com/ds/2/447/PYu-RC0402_51_RoHS_L_6_r-8721.pdf, ComponentLink5Description=http://www.farnell.com/datasheets/1018594.pdf, ComponentLink5URL=http://www.farnell.com/datasheets/1018594.pdf, ComponentLink6Description=http://www.farnell.com/datasheets/2167052.pdf, ComponentLink6URL=http://www.farnell.com/datasheets/2167052.pdf, Composition="Thick Film", Depth=0.5mm, Features="Moisture Resistant", Height=0.016inch, Lead Free="Lead Free", Length=1mm, Manufacturer Part Number=RC0402FR-072KL, Military Standard=Not, Number of Terminations=2, Packaging="Tape and Reel", Power Rating=63mW, Pricing 1="1=0.1, 10=0.018, 100=0.0073, 1000=0.0033, 2500=0.0029, 5000=0.0024 (USD)", REACH SVHC=Unknown, Stock 1=11965319, Supplier 1=Digi-Key, Termination=SMD/SMT, Voltage Rating (DC)=50V, Width=0.02inch, Working Voltage=50V
R5 R6 R11 R12 R21 R23 R24 R32 R33: library part RC0402FR-07330KL, "RES SMD 330K OHM 1% 1/16W 0402", Case/Package=0402, Case Code (Metric)=1005, Manufacturer=Yageo, Max Operating Temperature=155°C, Max Power Dissipation=63mW, Min Operating Temperature=-55°C, Package Quantity=1, Resistance=330kR, Supplier Part Number 1=311-330KLRCT-ND, Temperature Coefficient=100ppm/°C, Tolerance=1%, Voltage Rating=50V, Case Code (Imperial)=0402, ComponentLink1Description=http://www.yageo.com/documents/recent/PYu-RC_Group_51_RoHS_L_9.pdf, ComponentLink1URL=http://www.yageo.com/documents/recent/PYu-RC_Group_51_RoHS_L_9.pdf, ComponentLink2Description=http://www.mouser.com/ds/2/447/PYu-RC0402_51_RoHS_L_6_r-8721.pdf, ComponentLink2URL=http://www.mouser.com/ds/2/447/PYu-RC0402_51_RoHS_L_6_r-8721.pdf, ComponentLink3Description=http://www.farnell.com/datasheets/1018594.pdf, ComponentLink3URL=http://www.farnell.com/datasheets/1018594.pdf, ComponentLink4Description=http://www.yageo.com/documents/recent/PYu-RC0402_51_RoHS_L_6_r.pdf, ComponentLink4URL=http://www.yageo.com/documents/recent/PYu-RC0402_51_RoHS_L_6_r.pdf, Composition="Thick Film", Depth=0.5mm, Features="Moisture Resistant", Height=0.016inch, Lead Free="Lead Free", Length=1mm, Manufacturer Part Number=RC0402FR-07330KL, Military Standard=Not, Number of Terminations=2, Packaging="Tape and Reel", Power Rating=63mW, Pricing 1="1=0.1, 10=0.018, 100=0.0073, 1000=0.0033, 2500=0.0029, 5000=0.0024 (USD)", REACH SVHC=Unknown, Stock 1=1854774, Supplier 1=Digi-Key, Termination=SMD/SMT, Width=0.02inch
R8 R14 R15 R20 R26 R30 R35 R38: library part RC0402FR-071ML, "RES SMD 1M OHM 1% 1/16W 0402", Case/Package=0402, Case Code (Metric)=1005, Manufacturer=Yageo, Max Operating Temperature=155°C, Min Operating Temperature=-55°C, Power Rating=63mW, Resistance=1MR, Supplier Part Number 1=311-1.00MLRCT-ND, Temperature Coefficient=100ppm/°C, Tolerance=1%, Voltage Rating=50V, Case Code (Imperial)=0402, ComponentLink1Description=http://www.farnell.com/datasheets/1018594.pdf, ComponentLink1URL=http://www.farnell.com/datasheets/1018594.pdf, ComponentLink2Description=http://www.yageo.com/documents/recent/PYu-RC0402_51_RoHS_L_6_r.pdf, ComponentLink2URL=http://www.yageo.com/documents/recent/PYu-RC0402_51_RoHS_L_6_r.pdf, Composition="Thick Film", Depth=0.5mm, Height=0.32mm, Lead Free="Lead Free", Length=1mm, Manufacturer Part Number=RC0402FR-071ML, Military Standard=Not, Packaging="Tape and Reel", Pricing 1="1=0.1, 10=0.018, 100=0.0073, 1000=0.0033, 2500=0.0029, 5000=0.0024 (USD)", REACH SVHC=Unknown, Stock 1=18919667, Supplier 1=Digi-Key, Termination=SMD/SMT
R13 R18 R28 R37: library part RMCF0402FT499K, "RES SMD 499K 0402 1% 1/16W 100ppm/C Molded SMD Paper T/R", Case/Package=0402, Case Code (Metric)=1005, Manufacturer="Stackpole Electronics", Max Operating Temperature=155°C, Max Power Dissipation=63mW, Min Operating Temperature=-55°C, Package Quantity=10000, Resistance=499kR, Supplier Part Number 1=RMCF0402FT499KCT-ND, Temperature Coefficient=100ppm/°C, Tolerance=1%, Case Code (Imperial)=0402, Composition="Thick Film", Contact Plating=Matte,Tin, Features="Automotive AEC-Q200", Height=0.016inch, Lead Free="Lead Free", Length=0.039inch, Manufacturer Part Number=RMCF0402FT499K, Mount="Surface Mount", Number of Terminations=2, Packaging="Tape and Reel", Pricing 1="1=0.1, 10=0.016, 100=0.0064, 1000=0.0029, 2500=0.0025, 5000=0.0021 (USD)", Stock 1=80000, Supplier 1=Digi-Key, Width=0.02inch
R39 R40 R41 R42 R43 R44 R45 R46: library part RC0402JR-0710KL, "RES SMD 10K OHM 5% 1/16W 0402", Case/Package=0402, Case Code (Metric)=1005, Manufacturer=Yageo, Max Operating Temperature=155°C, Max Power Dissipation=63mW, Min Operating Temperature=-55°C, Package Quantity=1, Power Rating=62.5mW, Resistance=10kR, Supplier Part Number 1=311-10KJRCT-ND, Temperature Coefficient=100ppm/°C, Tolerance=5%, Voltage Rating=50V, Case Code (Imperial)=0402, Composition="Thick Film", Depth=0.5mm, Features="Moisture Resistant", Height=0.016inch, Lead Free="Lead Free", Length=1mm, Manufacturer Part Number=RC0402JR-0710KL, Military Standard=Not, Number of Terminations=2, Packaging="Tape and Reel", Pricing 1="1=0.1, 10=0.018, 100=0.0073, 1000=0.0033, 2500=0.0029, 5000=0.0024 (USD)", REACH SVHC=Unknown, Stock 1=47303622, Supplier 1=Digi-Key, Termination=SMD/SMT, Width=0.02inch
R47: library part RC0805FR-07100RL, "RES SMD 100 OHM 1% 1/8W 0805", Case/Package=0805, Case Code (Metric)=2012, Manufacturer=Yageo, Max Operating Temperature=155°C, Max Power Dissipation=125mW, Min Operating Temperature=-55°C, Package Quantity=1, Supplier Part Number 1=311-100CRCT-ND, Temperature Coefficient=100ppm/°C, Tolerance=1%, Voltage Rating=150V, Case Code (Imperial)=0805, ComponentLink1Description=http://www.farnell.com/datasheets/1697719.pdf, ComponentLink1URL=http://www.farnell.com/datasheets/1697719.pdf, ComponentLink2Description=http://www.yageo.ru/pdf/RC0805.pdf, ComponentLink2URL=http://www.yageo.ru/pdf/RC0805.pdf, ComponentLink3Description=http://www.farnell.com/datasheets/444164.pdf, ComponentLink3URL=http://www.farnell.com/datasheets/444164.pdf, ComponentLink4Description=http://www.yageo.com/documents/recent/PYu-RC_Group_51_RoHS_L_9.pdf, ComponentLink4URL=http://www.yageo.com/documents/recent/PYu-RC_Group_51_RoHS_L_9.pdf, ComponentLink5Description=http://www.farnell.com/datasheets/38627.pdf, ComponentLink5URL=http://www.farnell.com/datasheets/38627.pdf, ComponentLink6Description=http://www.farnell.com/datasheets/1686128.pdf, ComponentLink6URL=http://www.farnell.com/datasheets/1686128.pdf, Composition="Thick Film", Depth=1.25mm, Features="Moisture Resistant", Height=0.024inch, Lead Free="Lead Free", Lead Pitch=0.4mm, Length=2mm, Manufacturer Part Number=RC0805FR-07100RL, Military Standard=Not, Number of Pins=2, Number of Terminations=2, Packaging="Tape and Reel", Power Rating=125mW, Pricing 1="1=0.1, 10=0.046, 100=0.0186, 1000=0.0084, 2500=0.0073 (USD)", REACH SVHC=Unknown, Resistance=100R, Stock 1=12008452, Supplier 1=Digi-Key, Termination=SMD/SMT, Voltage Rating (DC)=150V, Width=0.049inch
R48 R49 R50 R51: library part RC0402JR-070RL, "RES SMD 0 OHM 1/16W 0402", Case/Package=0402, Case Code (Metric)=1005, Manufacturer=Yageo, Max Operating Temperature=155°C, Max Power Dissipation=63mW, Min Operating Temperature=-55°C, Package Quantity=1, Power Rating=62.5mW, Resistance=0mR, Supplier Part Number 1=311-0.0JRCT-ND, Temperature Coefficient=200ppm/°C, Tolerance=5%, Voltage Rating=50V, Case Code (Imperial)=0402, Composition="Thick Film", Contact Plating=Matte,Tin, Depth=0.5mm, Features="Moisture Resistant", Height=0.016inch, Lead Free="Lead Free", Length=1mm, Manufacturer Part Number=RC0402JR-070RL, Military Standard=Not, Number of Terminations=2, Packaging="Tape and Reel", Pricing 1="1=0.1, 10=0.017, 25=0.0124, 50=0.0096, 100=0.007, 250=0.0054, 500=0.0043, 1000=0.0032, 5000=0.0023 (USD)", Radiation Hardening=No, REACH SVHC=Unknown, Stock 1=44333412, Supplier 1=Digi-Key, Termination=SMD/SMT, Width=0.02inch
R52 R53 R54 R55: library part ERJ-2RKF3000X, "RES SMD 300R 0402 300 Ohm 1% 1/10W ±100ppm/C Molded SMD Punched Carrier T/R", Case/Package=0402, Case Code (Metric)=1005, Manufacturer=Panasonic, Max Operating Temperature=155°C, Max Power Dissipation=100mW, Min Operating Temperature=-55°C, Package Quantity=10000, Supplier Part Number 1=P300LCT-ND, Temperature Coefficient=100ppm/°C, Tolerance=1%, Voltage Rating=50V, Case Code (Imperial)=0402, ComponentLink1Description=https://www.alliedelec.com/m/d/623f45ff1957d936ff56d46fd1c28cac.pdf, ComponentLink1URL=https://www.alliedelec.com/m/d/623f45ff1957d936ff56d46fd1c28cac.pdf, ComponentLink2Description=http://industrial.panasonic.com/www-data/pdf/AOA0000/AOA0000CE2.pdf, ComponentLink2URL=http://industrial.panasonic.com/www-data/pdf/AOA0000/AOA0000CE2.pdf, ComponentLink3Description=http://www.farnell.com/datasheets/1911175.pdf, ComponentLink3URL=http://www.farnell.com/datasheets/1911175.pdf, ComponentLink4Description=http://components.arrow.com/part/dataview/41791037S8289418N1386, ComponentLink4URL=http://components.arrow.com/part/dataview/41791037S8289418N1386, ComponentLink5Description=http://www.mouser.com/ds/2/315/AOA0000CE2-37512.pdf, ComponentLink5URL=http://www.mouser.com/ds/2/315/AOA0000CE2-37512.pdf, ComponentLink6Description=http://www.farnell.com/datasheets/1694929.pdf, ComponentLink6URL=http://www.farnell.com/datasheets/1694929.pdf, Composition="Thick Film", Contact Plating=Tin, Depth=0.5mm, Height=0.35mm, Lead Free="Lead Free", Length=1mm, Manufacturer Part Number=ERJ-2RKF3000X, Military Standard=Not, Mount="Surface Mount", Number of Terminations=2, Packaging="Tape and Reel", Power Rating=100mW, Pricing 1="1=0.1, 10=0.054, 100=0.0221, 1000=0.0099, 2500=0.0086, 5000=0.0071 (USD)", REACH SVHC="No SVHC", Resistance=300R, Stock 1=2431619, Supplier 1=Digi-Key, Termination=SMD/SMT, Voltage Rating (DC)=50V, Width=0.02inch
U1 U3: "LDO 3.0V 150mA CMOS w/Enable", Case/Package=TSOP, Dropout Voltage=40mV, Input Bias Current=4uA, Manufacturer="ON Semiconductor", Max Input Voltage=12V, Max Operating Temperature=85°C, Max Output Current=150mA, Min Input Voltage=0uV, Min Operating Temperature=-40°C, Min Output Voltage=3V, Output Voltage Accuracy=2%, Package Quantity=1, Quiescent Current=8uA, Supplier Part Number 1=NCP551SN30T1GOSCT-ND, Accuracy=2%, ComponentLink1Description=http://www.onsemi.ru.com/pub/Collateral/NCP551-D.PDF, ComponentLink1URL=http://www.onsemi.ru.com/pub/Collateral/NCP551-D.PDF, ComponentLink2Description=http://www.onsemi.com/pub/Collateral/NCP551-D.PDF, ComponentLink2URL=http://www.onsemi.com/pub/Collateral/NCP551-D.PDF, Contact Plating=Matte,Tin, Halogen Free="Halogen Free", Height=1mm, Lead Free="Lead Free", Length=3mm, Manufacturer Part Number=NCP551SN30T1G, Mount="Surface Mount", Nominal Output Voltage=3V, Number of Outputs=1, Number of Pins=5, Number of Regulators=1, Output Current=150mA, Output Type=Fixed, Output Voltage=3V, Packaging="Tape and Reel", Polarity=Positive, Pricing 1="1=0.54, 10=0.46, 100=0.3432, 500=0.2697, 1000=0.2084 (USD)", Radiation Hardening=No, REACH SVHC="No SVHC", Stock 1=9920, Supplier 1=Digi-Key, Width=1.5mm
U2: "IC Analog Front End - AFE 4 Chnl Energy Meter Front End 3V SPI/2", Case/Package=SSOP, Manufacturer=Microchip, Max Operating Temperature=125°C, Max Supply Voltage=3.6V, Min Operating Temperature=-40°C, Min Supply Voltage=2.7V, Package Quantity=47, Supplier Part Number 1=MCP3912A1-E/SS-ND, Height=1.85mm, Interface=Serial,SPI, Lead Free="Lead Free", Length=10.5mm, Manufacturer Part Number=MCP3912A1-E/SS, Mount="Surface Mount", Number of A/D Converters=4, Number of Channels=4, Number of Pins=28, Packaging=Rail/Tube, Pricing 1="1=3.33, 25=2.7708, 100=2.5235 (USD)", REACH SVHC="No SVHC", Resolution=24b, Sampling Rate=125KS/s, Stock 1=156, Supplier 1=Digi-Key, Width=5.6mm
U4 U6 U9 U12: "IC OPAMP INSTR 200KHZ RRO 8MSOP", Case/Package=MSOP, Input Bias Current=250pA, Input Offset Voltage (Vos)=75uV, Manufacturer="Analog Devices", Max Operating Temperature=125°C, Max Supply Voltage=5.5V, Min Operating Temperature=-40°C, Min Supply Voltage=1.8V, Nominal Supply Current=115uA, Output Current per Channel=4mA, Package Quantity=1, Supplier Part Number 1=AD8237ARMZ-R7CT-ND, Voltage Gain=60dB, -3db Bandwidth=200kHz, Bandwidth=20kHz, Common Mode Rejection Ratio=106dB, ComponentLink1Description=http://www.analog.com/media/en/technical-documentation/data-sheets/AD8237.pdf, ComponentLink1URL=http://www.analog.com/media/en/technical-documentation/data-sheets/AD8237.pdf, ComponentLink2Description=http://www.analog.com/static/imported-files/data_sheets/AD8237.pdf, ComponentLink2URL=http://www.analog.com/static/imported-files/data_sheets/AD8237.pdf, Contact Plating=Matte,Tin, Lead Free="Contains Lead", Manufacturer Part Number=AD8237ARMZ-R7, Mount="Surface Mount", Number of Channels=1, Number of Circuits=1, Number of Elements=1, Number of Pins=8, Operating Supply Current=115uA, Packaging="Tape and Reel", Pricing 1="1=2.76, 10=2.476, 100=2.0286, 500=1.7269 (USD)", Slew Rate=0.15V/µs, Stock 1=16545, Supplier 1=Digi-Key
U5: "IC OP AMP R-R I/O DUAL 30V 8SOIC", Case/Package=SOIC, Input Bias Current=1uA, Input Offset Voltage (Vos)=2mV, Manufacturer="TI National Semiconductor", Max Dual Supply Voltage=16V, Max Operating Temperature=125°C, Max Supply Voltage=32V, Min Dual Supply Voltage=1.25V, Min Operating Temperature=-40°C, Min Supply Voltage=2.5V, Nominal Supply Current=2mA, Output Current=70mA, Package Quantity=2500, Power Supply Rejection Ratio (PSRR)=78dB, Supplier Part Number 1=296-35310-1-ND, Voltage Gain=77dB, Common Mode Rejection Ratio=62dB, ComponentLink1Description=http://www.ti.com/lit/ds/symlink/lm7332.pdf, ComponentLink1URL=http://www.ti.com/lit/ds/symlink/lm7332.pdf, Contact Plating=Tin, Gain Bandwidth Product=21MHz, Lead Free="Lead Free", Manufacturer Part Number=LM7332MAX/NOPB, Mount="Surface Mount", Number of Channels=2, Number of Circuits=2, Number of Elements=2, Number of Pins=8, Operating Supply Current=2mA, Operating Supply Voltage=16V, Output Current per Channel=70mA, Packaging="Tape and Reel", Pricing 1="1=2.67, 10=2.402, 100=1.9306, 500=1.5862, 1000=1.3143 (USD)", Radiation Hardening=No, Slew Rate=15.2V/µs, Stock 1=7321, Supplier 1=Digi-Key, Unity Gain Bandwidth Product=19.3MHz
U7 U8 U10 U11 U13: "IC OPAMP ZRO-DRFT 300KHZ SOT23-5", Case/Package=SOT-23, Input Bias Current=5pA, Input Offset Voltage (Vos)=8uV, Manufacturer=Microchip, Max Operating Temperature=125°C, Max Supply Voltage=5.5V, Min Operating Temperature=-40°C, Min Supply Voltage=1.8V, Nominal Supply Current=23uA, Output Current=21mA, Package Quantity=3000, Power Supply Rejection Ratio (PSRR)=120dB, Supplier Part Number 1=MCP6V31T-E/OTCT-ND, Voltage Gain=135dB, Bandwidth=300kHz, Common Mode Rejection Ratio=120dB, ComponentLink1Description=http://ww1.microchip.com/downloads/en/DeviceDoc/25127A.pdf, ComponentLink1URL=http://ww1.microchip.com/downloads/en/DeviceDoc/25127A.pdf, ComponentLink2Description=https://www.distrelec.biz/Web/Downloads/_t/ds/MCP6V31_1U_eng_tds.pdf?mime=application%2Fpdf, ComponentLink2URL=https://www.distrelec.biz/Web/Downloads/_t/ds/MCP6V31_1U_eng_tds.pdf?mime=application%2Fpdf, ComponentLink3Description=https://www.verical.com/server-webapp/html/getDatasheet?partID=762349, ComponentLink3URL=https://www.verical.com/server-webapp/html/getDatasheet?partID=762349, ComponentLink4Description=http://ww1.microchip.com/downloads/jp/DeviceDoc/jp557758.pdf, ComponentLink4URL=http://ww1.microchip.com/downloads/jp/DeviceDoc/jp557758.pdf, ComponentLink5Description=http://www.microchip.com/mymicrochip/filehandler.aspx?ddocname=en557758, ComponentLink5URL=http://www.microchip.com/mymicrochip/filehandler.aspx?ddocname=en557758, ComponentLink6Description=http://www.farnell.com/datasheets/1599560.pdf, ComponentLink6URL=http://www.farnell.com/datasheets/1599560.pdf, Gain Bandwidth Product=300kHz, Height=1.3mm, Lead Free="Lead Free", Length=3.1mm, Manufacturer Part Number=MCP6V31T-E/OT, Number of Amplifiers=1, Number of Channels=1, Number of Circuits=1, Number of Elements=1, Number of Pins=5, Operating Supply Current=23uA, Output Current per Channel=21mA, Packaging="Tape and Reel", Pricing 1="1=1.11, 25=0.9272, 100=0.8446 (USD)", Radiation Hardening=No, REACH SVHC="No SVHC", Slew Rate=0.13V/µs, Stock 1=12497, Supplier 1=Digi-Key, Unity Gain Bandwidth Product=300kHz, Width=1.8mm
U14: "IC CURRENT SOURCE 3% 8SOIC", Case/Package=SOIC, Forward Current=5mA, Forward Voltage=1V, Manufacturer="TI National Semiconductor", Max Input Voltage=40V, Max Operating Temperature=85°C, Max Power Dissipation=400mW, Max Supply Current=10mA, Min Operating Temperature=-40°C, Min Supply Voltage=800mV, Output Voltage=20V, Package Quantity=2500, Quiescent Current=1uA, Supplier Part Number 1=LM334MX/NOPBCT-ND, Accuracy=6%, ComponentLink1Description=https://www.verical.com/server-webapp/html/getDatasheet?partID=629166, ComponentLink1URL=https://www.verical.com/server-webapp/html/getDatasheet?partID=629166, ComponentLink2Description=http://www.ti.com/lit/ds/symlink/lm234.pdf, ComponentLink2URL=http://www.ti.com/lit/ds/symlink/lm234.pdf, ComponentLink3Description=http://www.ti.com/general/docs/lit/getliterature.tsp?genericPartNumber=LM334&&fileType=pdf, ComponentLink3URL=http://www.ti.com/general/docs/lit/getliterature.tsp?genericPartNumber=LM334&&fileType=pdf, ComponentLink4Description=http://www.farnell.com/datasheets/1883087.pdf, ComponentLink4URL=http://www.farnell.com/datasheets/1883087.pdf, Lead Free="Lead Free", Manufacturer Part Number=LM334MX/NOPB, Max Supply Voltage=40V, Min Input Voltage=1V, Mount="Surface Mount", Number of Outputs=1, Number of Pins=8, Output Current=10mA, Output Type=Analog, Packaging="Tape and Reel", Pricing 1="1=0.9, 10=0.802, 100=0.6254, 500=0.5166, 1000=0.4079 (USD)", Radiation Hardening=No, REACH SVHC="No SVHC", Reference Type=Adjustable, Stock 1=58254, Supplier 1=Digi-Key
U15: "IC 10K Digital Potentiometer Single, 2 Wire, Serial,  20%, 1.8 V", Case/Package=SOIC, Manufacturer=Microchip, Max Operating Temperature=125°C, Max Supply Current=45uA, Max Supply Voltage=5.5V, Min Operating Temperature=-40°C, Min Supply Voltage=1.8V, Operating Supply Voltage=5V, Package Quantity=100, Resistance=10kR, Supplier Part Number 1=MCP4011-103E/SN-ND, Temperature Coefficient=150ppm/°C, Tolerance=20%, ComponentLink1Description=http://ww1.microchip.com/downloads/en/DeviceDoc/21978c.pdf, ComponentLink1URL=http://ww1.microchip.com/downloads/en/DeviceDoc/21978c.pdf, ComponentLink2Description=https://www.verical.com/server-webapp/html/getDatasheet?partID=431510, ComponentLink2URL=https://www.verical.com/server-webapp/html/getDatasheet?partID=431510, ComponentLink3Description=http://www.microchip.com/mymicrochip/filehandler.aspx?ddocname=en025230, ComponentLink3URL=http://www.microchip.com/mymicrochip/filehandler.aspx?ddocname=en025230, ComponentLink4Description=http://www.microchip.com/mymicrochip/filehandler.aspx?ddocname=en023833, ComponentLink4URL=http://www.microchip.com/mymicrochip/filehandler.aspx?ddocname=en023833, ComponentLink5Description=https://www.distrelec.biz/Web/Downloads/_t/ds/mcp4011_eng_tds.pdf?mime=application%2Fpdf, ComponentLink5URL=https://www.distrelec.biz/Web/Downloads/_t/ds/mcp4011_eng_tds.pdf?mime=application%2Fpdf, ComponentLink6Description=http://www.farnell.com/datasheets/130143.pdf, ComponentLink6URL=http://www.farnell.com/datasheets/130143.pdf, Contact Plating=Matte,Tin, Height=1.55mm, Interface=2-Wire,Serial, Lead Free="Lead Free", Length=5mm, Manufacturer Part Number=MCP4011-103E/SN, Memory Type=Volatile, Mount="Surface Mount", Nominal Supply Current=45uA, Number of Circuits=1, Number of Elements=1, Number of Pins=8, Number of Positions=64, Number of Taps=64, Packaging=Rail/Tube, Pricing 1="1=0.53, 25=0.4428, 100=0.4017 (USD)", Radiation Hardening=No, REACH SVHC="No SVHC", Stock 1=1448, Supplier 1=Digi-Key, Taper=Linear, Width=3.99mm
U16 U17 U18: "IC ESD Suppressor Diode Arrays 5.5V 6-Pin SOT-23 T/R", Breakdown Voltage=6.5V, Capacitance=1pF, Case/Package=SOT-23, Clamping Voltage=15V, Leakage Current=10nA, Manufacturer="Texas Instruments", Max Operating Temperature=125°C, Max Power Dissipation=45W, Min Operating Temperature=-40°C, Operating Supply Voltage=5.5V, Package Quantity=3000, Peak Pulse Current=3A, Power Line Protection=Yes, Supplier Part Number 1=296-35965-1-ND, Test Current=1mA, ComponentLink1Description=https://www.verical.com/server-webapp/html/getDatasheet?partID=716791, ComponentLink1URL=https://www.verical.com/server-webapp/html/getDatasheet?partID=716791, ComponentLink2Description=http://www.ti.com/lit/ds/symlink/tpd4e1u06.pdf, ComponentLink2URL=http://www.ti.com/lit/ds/symlink/tpd4e1u06.pdf, Depth=1.75mm, Direction=Unidirectional, ESD Protection=Yes, Height=1.3mm, Interface=Ethernet,LVDS,USB, Lead Free="Lead Free", Length=3.05mm, Manufacturer Part Number=TPD4E1U06DBVR, Max Reverse Leakage Current=10nA, Min Breakdown Voltage=6.5V, Mount="Surface Mount", Number of Bidirectional Channels=4, Number of Channels=4, Number of Pins=6, Packaging="Tape and Reel", Peak Pulse Power=45W, Polarity=Bidirectional, Pricing 1="1=0.43, 10=0.346, 100=0.2353, 500=0.1765, 1000=0.1324 (USD)", Radiation Hardening=No, REACH SVHC="No SVHC", Reverse Standoff Voltage=5.5V, Stock 1=155098, Supplier 1=Digi-Key, Termination=SMD/SMT, Width=1.75mm, Working Voltage=5.5V
XTAL: "4MHz ±20ppm Crystal 18pF 180 Ohm -20°C ~ 70°C  Surface Mount HC49/US", Case/Package=SMD/SMT, ESR (Equivalent Series Resistance)=180R, Frequency=4MHz, Frequency Stability=50ppm, Frequency Tolerance=20ppm, Load Capacitance=18pF, Manufacturer=Abracon, Max Operating Temperature=70°C, Min Operating Temperature=-20°C, Package Quantity=1000, Supplier Part Number 1=535-9085-1-ND, ComponentLink1Description=https://abracon.com/Support/PackageDrawing/Resonators/ABLS-2D.pdf, ComponentLink1URL=https://abracon.com/Support/PackageDrawing/Resonators/ABLS-2D.pdf, ComponentLink2Description=http://www.abracon.com/Resonators/abls.pdf, ComponentLink2URL=http://www.abracon.com/Resonators/abls.pdf, ComponentLink3Description=https://www.verical.com/server-webapp/html/getDatasheet?partID=722412, ComponentLink3URL=https://www.verical.com/server-webapp/html/getDatasheet?partID=722412, ComponentLink4Description=http://www.mouser.com/ds/2/3/abls-44621.pdf, ComponentLink4URL=http://www.mouser.com/ds/2/3/abls-44621.pdf, Depth=4.7mm, Height=0.165inch, Lead Free="Lead Free", Length=11.4mm, Manufacturer Part Number=ABLS-4.000MHZ-B2-T, Mount="Surface Mount", Number of Pins=2, Packaging="Tape and Reel", Pricing 1="1=0.28, 10=0.234, 50=0.2104, 100=0.187, 500=0.1777 (USD)", Radiation Hardening=No, REACH SVHC=Yes, Series Resistance=180R, Stock 1=74308, Supplier 1=Digi-Key, Termination=SMD/SMT, Tolerance=20ppm, Width=0.185inch

## Free pads (board coordinates)
  rect 0x0 hole 3: 2(24.4,81.5) 2(24.5,28.6) 2(93.5,29) 2(93.5,81.5)

## Via types
v1: diameter 0.6, hole 0.4, Top Layer to Bottom Layer, 142 vias